# EAGLE board 00A-006 (EAGLE 6.3)
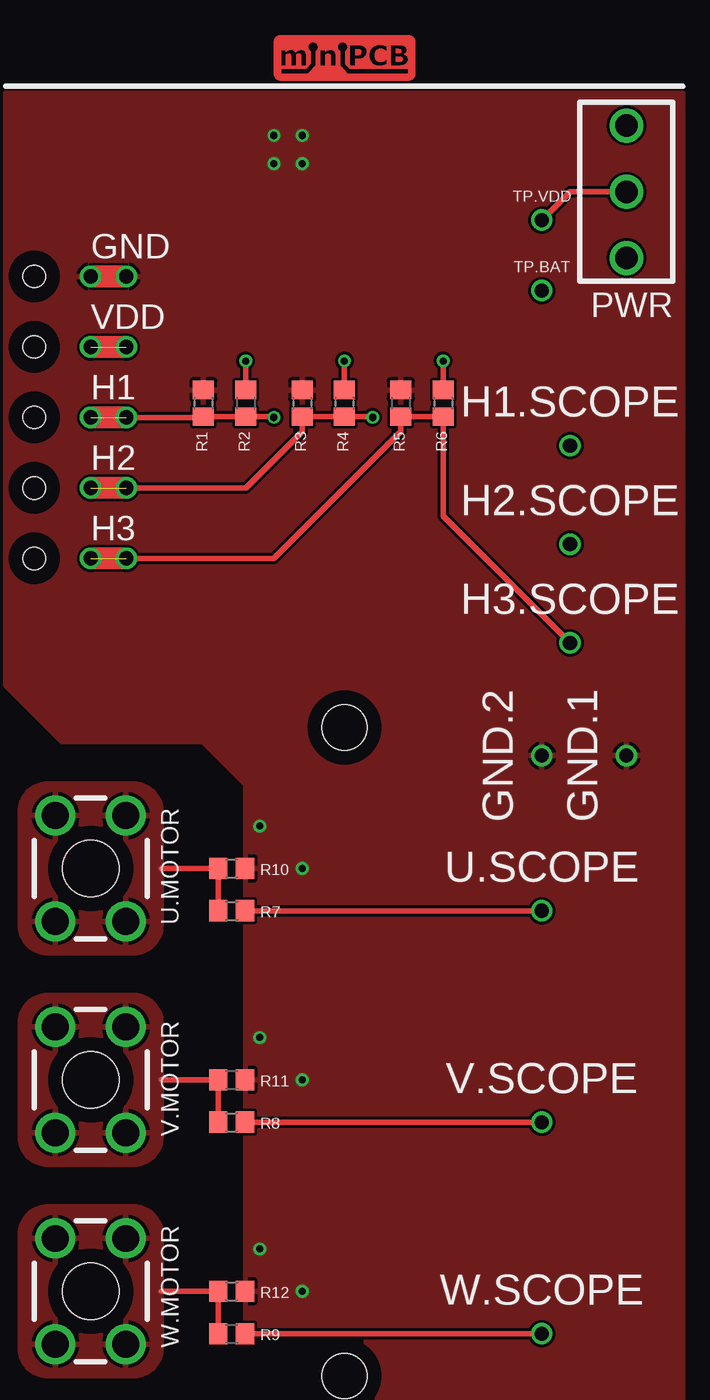
[diagram p0: board, top side]
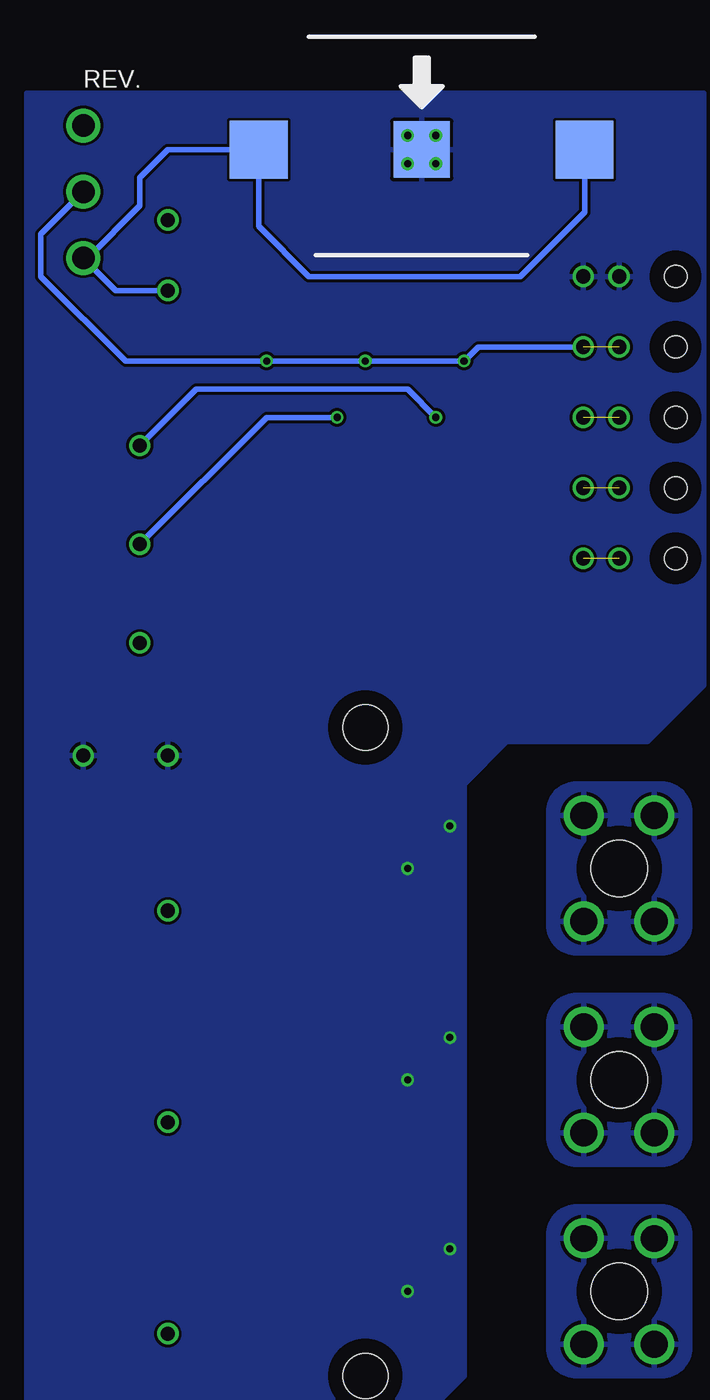
[diagram p1: board, bottom side, seen from below]

No outline drawn. Coordinates in mm, seen from the top.
Copper layers (1*16): Top 0.035mm / dielectric 1.5mm / Bottom 0.035mm
Design rules "default": minimum track width 10mil, minimum drill 24mil, track to track 8mil, track to pad 8mil, pad to pad 8mil, via to via 8mil, smd to smd 8mil, copper to edge 40mil, drill to drill 8mil, minimum pad ring 10mil, minimum via ring 8mil, stop-mask expansion 4mil, vias tented up to drill 0mil, thermal gap 10mil
Holes 4 mm at 7,40 7,25 7,10
Holes 1.6 mm at 3,82 3,77 3,72 3,67 3,62
Holes 3.2 mm at 25,4 25,50

## Footprints (pad centres in the part's own frame; a part is rotated, then mirrored left to right if it is on the bottom)
BATTERY-CR3032-KE3034 = smd 4.1 x 4.1: 1+ -11.55,0; 2+ 11.55,0 | smd 4 x 4: 3- 0,0
PINS_1_TESTPOINT_KE5000 = drill 1: 1 0,0
PINS_1_1MM = drill 1: 1 0,0; 2 2.54,0
CK1101 = drill 1.6: P$1 0,4.699; P$2 0,0; P$3 0,-4.699
R0805 = smd 1.3 x 1.5: 1 -0.95,0; 2 0.95,0
PINS_1_TESTPOINT_KE5000_NOTEXT = drill 1: 1 0,0
SCREW-TERMINAL-M3 = drill 1.9: 1 -2.5,3.75; 2 2.5,3.75; 3 -2.5,-3.75; 4 2.5,-3.75

## Placement (x,y rotation side)
B1  CR3032  [BATTERY-CR3032-KE3034]  21,91 0 bottom
GND.1  [PINS_1_TESTPOINT_KE5000]  45,48 90 top
GND.2  TESTPOINTKE5000  [PINS_1_TESTPOINT_KE5000]  39,48 90 top
H1.SCOPE  [PINS_1_TESTPOINT_KE5000]  41,70 0 top
H1.SENSOR  H1  [PINS_1_1MM]  7,72 0 top
H2.SCOPE  [PINS_1_TESTPOINT_KE5000]  41,63 0 top
H2.SENSOR  H2  [PINS_1_1MM]  7,67 0 top
H3.SCOPE  [PINS_1_TESTPOINT_KE5000]  41,56 0 top
H3.SENSOR  H3  [PINS_1_1MM]  7,62 0 top
H.GND  GND  [PINS_1_1MM]  7,82 0 top
H.VDD  VDD  [PINS_1_1MM]  7,77 0 top
PWR  CK1101  [CK1101]  45,88 180 top
R1  2k2  [R0805]  15,73 270 top
R2  2k2  [R0805]  18,73 270 top
R3  2k2  [R0805]  22,73 270 top
R4  2k2  [R0805]  25,73 270 top
R5  2k2  [R0805]  29,73 270 top
R6  2k2  [R0805]  32,73 270 top
R7  220k  [R0805]  17,37 0 top
R8  220k  [R0805]  17,22 0 top
R9  220k  [R0805]  17,7 0 top
R10  220k  [R0805]  17,40 0 top
R11  220k  [R0805]  17,25 0 top
R12  220k  [R0805]  17,10 0 top
TP.BAT  TESTPOINTKE5000-SMTEXT  [PINS_1_TESTPOINT_KE5000_NOTEXT]  39,81 0 top
TP.VDD  TESTPOINTKE5000-SMTEXT  [PINS_1_TESTPOINT_KE5000_NOTEXT]  39,86 0 top
U$1  MINIPCB_0P50X100  [MINIPCB_0P_50X100]  0,0 0 top
U.MOTOR  [SCREW-TERMINAL-M3]  7,40 0 top
U.SCOPE  [PINS_1_TESTPOINT_KE5000]  39,37 0 top
V.MOTOR  [SCREW-TERMINAL-M3]  7,25 0 top
V.SCOPE  [PINS_1_TESTPOINT_KE5000]  39,22 0 top
W.MOTOR  [SCREW-TERMINAL-M3]  7,10 0 top
W.SCOPE  [PINS_1_TESTPOINT_KE5000]  39,7 0 top

## Library data of the parts
B1 GND.1 GND.2 H1.SCOPE H1.SENSOR H2.SCOPE H2.SENSOR H3.SCOPE H3.SENSOR H.GND H.VDD PWR R1-R12 TP.BAT TP.VDD U.MOTOR U.SCOPE V.MOTOR V.SCOPE W.MOTOR W.SCOPE = minipcb
U$1 = minipcb; PART_NUMBER: #00A-006; REVISION: A

## Nets
GND: B1.3- GND.1.1 GND.2.1 H.GND.1 H.GND.2 R1.1 R3.1 R5.1 R10.2 R11.2 R12.2
H1: H1.SCOPE.1 H1.SENSOR.1 H1.SENSOR.2 R1.2 R2.2
H2: H2.SCOPE.1 H2.SENSOR.1 H2.SENSOR.2 R3.2 R4.2
H3: H3.SCOPE.1 H3.SENSOR.1 H3.SENSOR.2 R5.2 R6.2
HVDD: H.VDD.1 H.VDD.2 PWR.P$2 R2.1 R4.1 R6.1 TP.VDD.1
U.MOTOR: R7.1 R10.1 U.MOTOR.1 U.MOTOR.2 U.MOTOR.3 U.MOTOR.4
U.SCOPE: R7.2 U.SCOPE.1
V.BAT: B1.1+ B1.2+ PWR.P$1 TP.BAT.1
V.MOTOR: R8.1 R11.1 V.MOTOR.1 V.MOTOR.2 V.MOTOR.3 V.MOTOR.4
V.SCOPE: R8.2 V.SCOPE.1
W.MOTOR: R9.1 R12.1 W.MOTOR.1 W.MOTOR.2 W.MOTOR.3 W.MOTOR.4
W.SCOPE: R9.2 W.SCOPE.1

## Tracks (layer width: path | path; a pad name or v marks a point on that pad's centre or on a via)
GND  (via drill 0.5)
  other vias: 19,43 22,40 19,28 22,25 19,13 22,10 20,92 22,92 22,90 20,90
  pour Bottom: 21,1 49,1 49,95 1,95 1,53 5,49 15,49 18,46 18,4
  pour Top: 21,1 49,1 49,95 1,95 1,53 5,49 15,49 18,46 18,4
H1  (via drill 0.5)  (1 unrouted)
  Top 0.406: v20,72 19.95,72.05 R2.2 R1.2 arc-90 14.95,72 H1.SENSOR.2
  Bottom 0.406: v20,72 22,74 37,74 H1.SCOPE.1
H2  (via drill 0.5)  (1 unrouted)
  Top 0.406: v27,72 26.95,72.05 R4.2 R3.2 22,71 18,67 H2.SENSOR.2
  Bottom 0.406: v27,72 32,72 H2.SCOPE.1
H3  (1 unrouted)
  Top 0.406: H3.SCOPE.1 32,65 R6.2 R5.2 29,71 20,62 H3.SENSOR.2
HVDD  (via drill 0.5)  (1 unrouted)
  Top 0.406: v32,76 R6.1 | R4.1 v25,76 | R2.1 v18,76 | TP.VDD.1 41,88 PWR.P$2
  Bottom 0.406: PWR.P$2 48,85 48,82 42,76 v32,76 v25,76 v18,76 17,77 H.VDD.2
U.MOTOR
  Top 0.406: 12,40 R10.1 R7.1
  pour Top: 4,46 10,46 arc-90 12,44 12,36 arc-90 10,34 4,34 arc-90 2,36 2,44 arc-90
  pour Bottom: 4,46 10,46 arc-90 12,44 12,36 arc-90 10,34 4,34 arc-90 2,36 2,44 arc-90
U.SCOPE
  Top 0.406: R7.2 U.SCOPE.1
V.BAT
  Bottom 0.406: TP.BAT.1 42.7,81 PWR.P$1 44.7,83.3 41,87 41,89 39,91 B1.1+ 32.55,85.55 29,82 14,82 9.45,86.55 B1.2+
V.MOTOR
  Top 0.406: 12,25 R11.1 R8.1
  pour Top: 4,31 10,31 arc-90 12,29 12,21 arc-90 10,19 4,19 arc-90 2,21 2,29 arc-90
  pour Bottom: 4,31 10,31 arc-90 12,29 12,21 arc-90 10,19 4,19 arc-90 2,21 2,29 arc-90
V.SCOPE
  Top 0.406: R8.2 V.SCOPE.1
W.MOTOR
  Top 0.406: 12,10 R12.1 R9.1
  pour Top: 4,16 10,16 arc-90 12,14 12,6 arc-90 10,4 4,4 arc-90 2,6 2,14 arc-90
  pour Bottom: 4,16 10,16 arc-90 12,14 12,6 arc-90 10,4 4,4 arc-90 2,6 2,14 arc-90
W.SCOPE
  Top 0.406: R9.2 W.SCOPE.1